# Altium PCB PCB1.PcbDoc
Units mm, origin at the board's own origin, x right, y up, seen from the top; angles counter-clockwise.
Board outline 93.22 x 51.43 mm, 2 copper layers (Top Layer, Bottom Layer); 35 components, 31 nets, 133 pads, 0 vias.
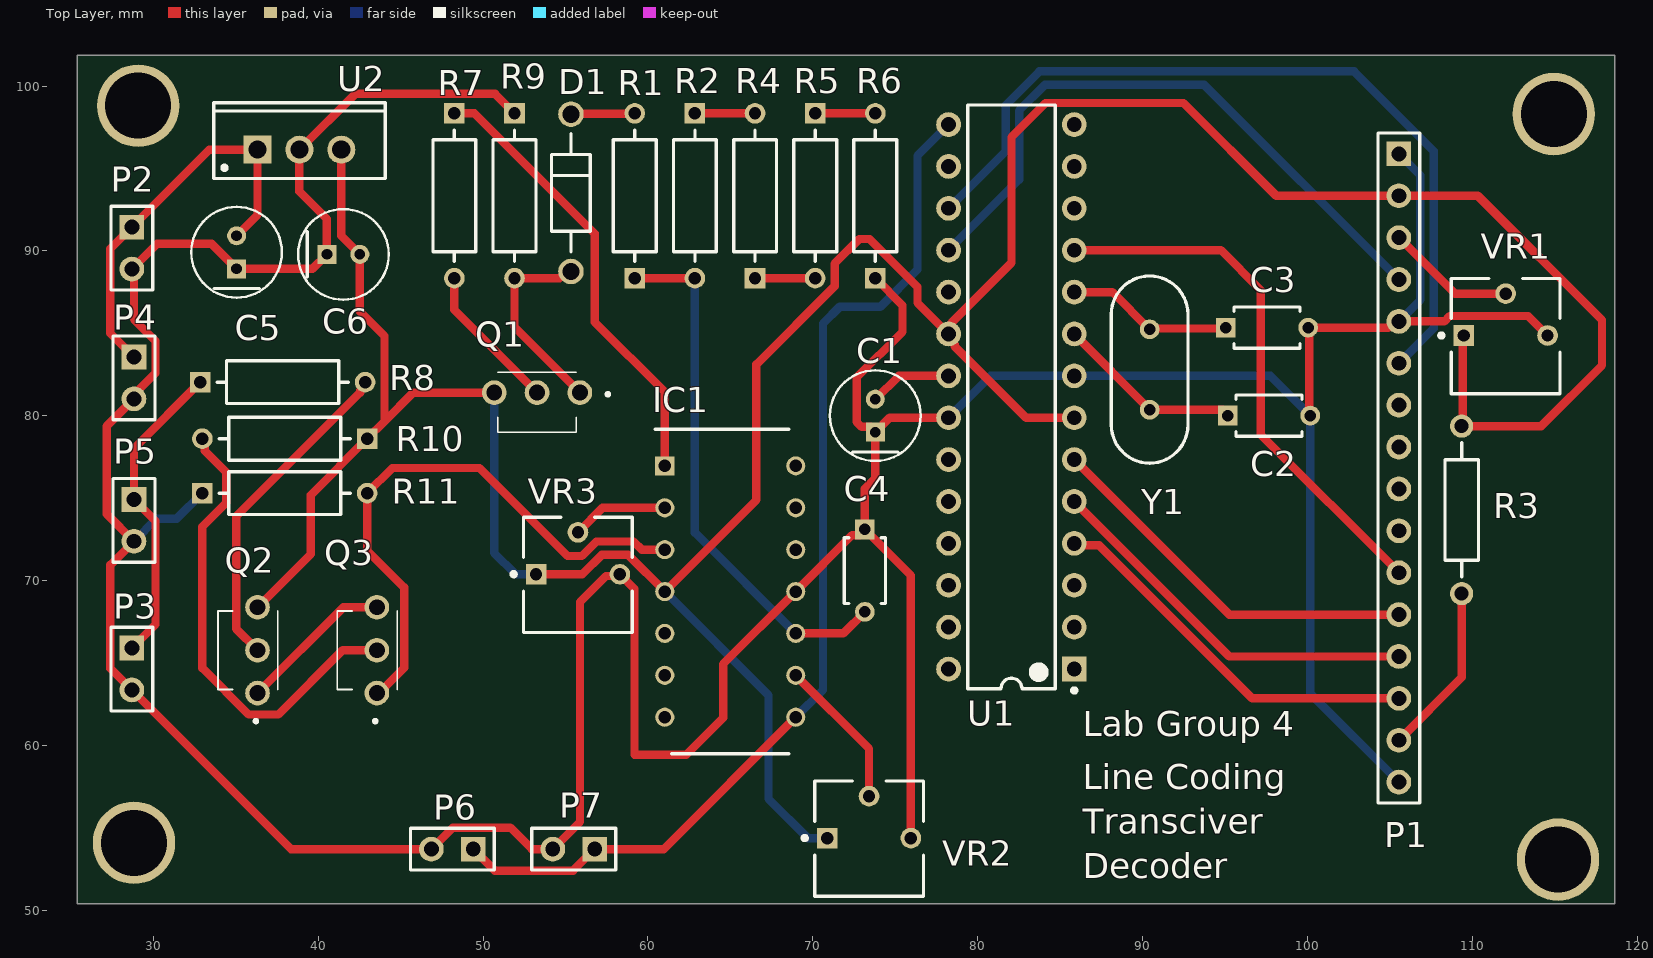
[diagram p0: Top Layer view]
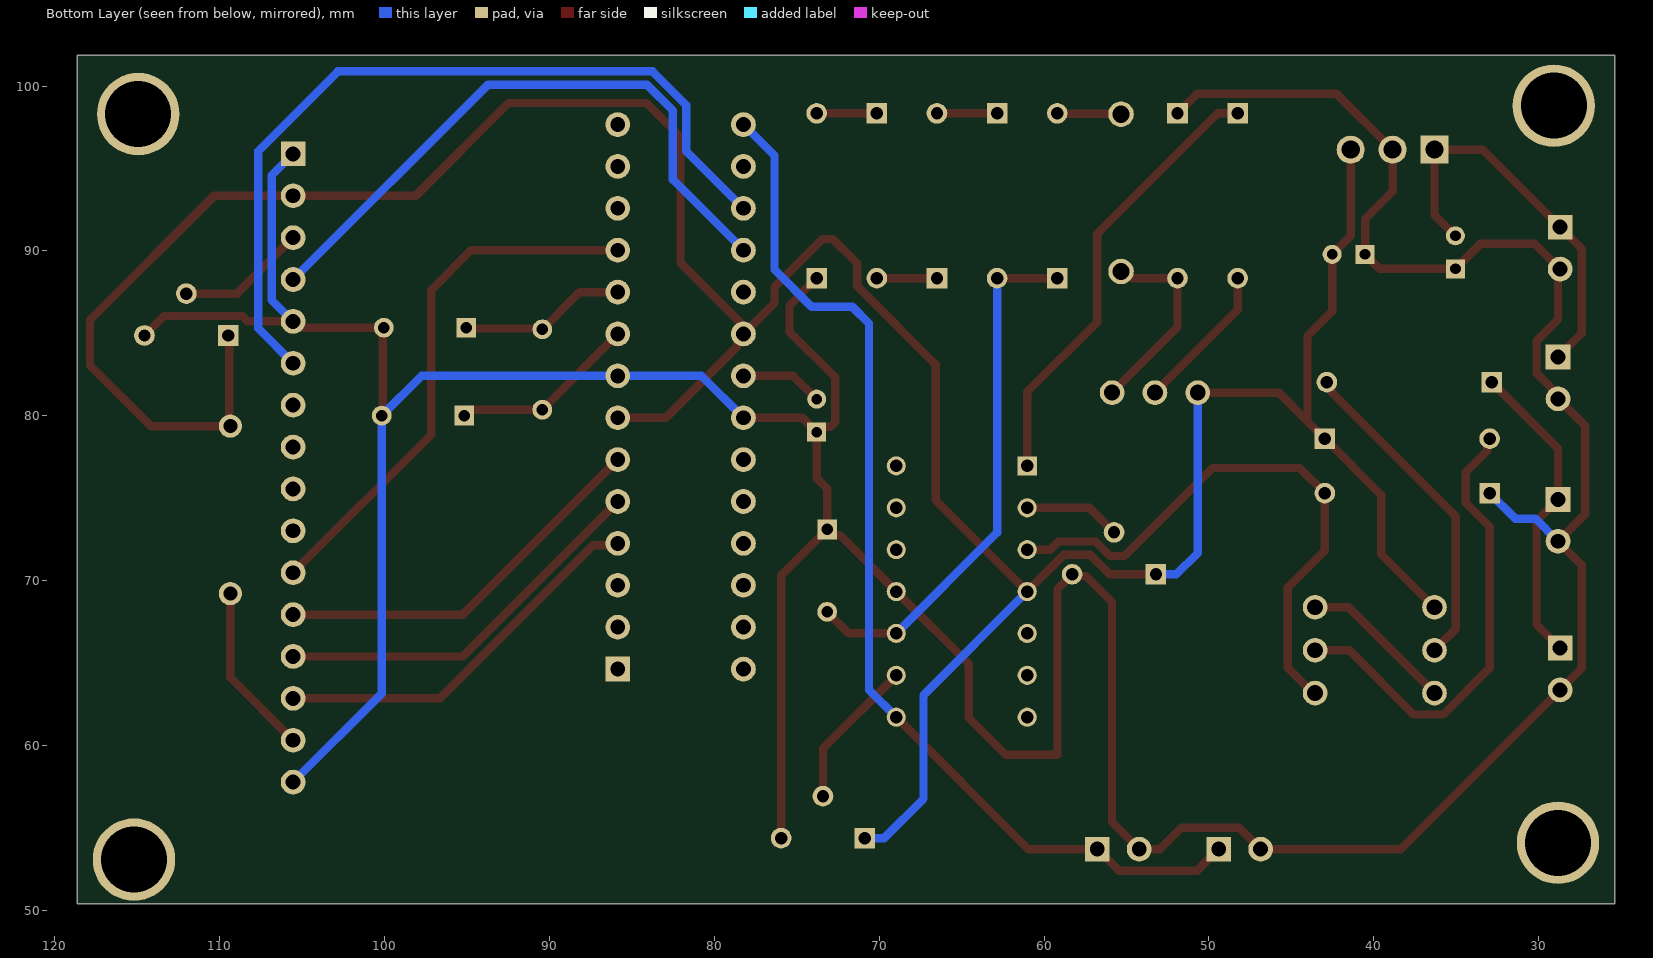
[diagram p1: Bottom Layer view, seen from below]
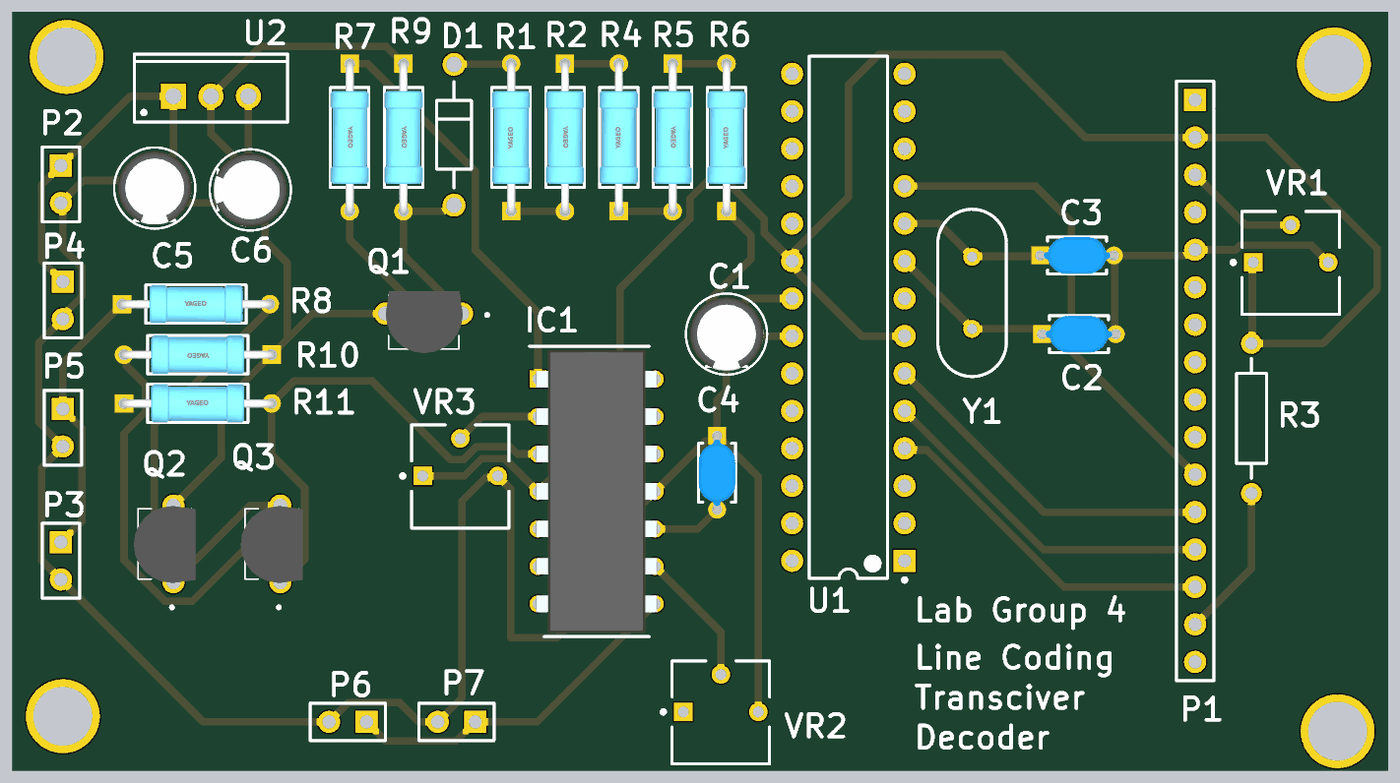
[diagram p2: 3D render of the assembled board from above, using the file's embedded part models]

## Layer stack, top to bottom
Top Solder: solder mask 0.0102, Solder Resist, Dk 3.5
Top Layer: signal copper 0.0356
Dielectric 1: dielectric 0.32, FR-4, Dk 4.8
Bottom Layer: signal copper 0.0356
Bottom Solder: solder mask 0.0102, Solder Resist, Dk 3.5

## Board outline
25.4,50.419 118.618,50.419 118.618,101.854 25.4,101.854

## Design rules (kind name [scope] priority, off if disabled: settings)
AssemblyTestPointUsage [All] p1: valid=2
Clearance [All] p1: gap=0.3 ignorepadtopadclearanceinfootprint=TRUE
FabricationTestPointUsage [All] p1: valid=2 allowmultiple=FALSE
HoleSize [All] p1: absolutevalues=TRUE maxlimit=1.3 minlimit=0.6 maxpercent=80.000 minpercent=20.000
PolygonConnect [All] p1: connectstyle=Relief reliefconductorwidth=0.254 reliefentries=4 polygonreliefangle="90 Angle" airgapwidth=0.254
RoutingVias [All] p1: holewidth=0.711 width=1.27 viastyle="Through Hole" minholewidth=0.711 minwidth=1.27 maxholewidth=0.711 maxwidth=1.27
SilkToSilkClearance [All] p1: silktosilkclearance=0.1
SolderMaskExpansion [All] p1: expansion=0.102 istentingtop=FALSE
Width [All] p1: maxlimit=0.635 minlimit=0.381 preferedwidth=0.508
26 further rules are at their usual default settings.

## Components (designator, comment, footprint, x,y, rotation, side; value= is the part's Value field where it differs from the comment)
C1 "UVR2AR22MDD1TD" FP-UVR2AR22MDD1TD-MFG 73.787,80.01 r90 top
C2 "22pF" FP-RDE0M1-MFG 97.663,80.01 r0 top
C3 "22pF" FP-RDE0M1-MFG 97.536,85.344 r0 top
C4 "22pF" FP-RDE0M1-MFG 73.152,70.612 r270 top
C5 "UVR2AR22MDD1TD" FP-UVR2AR22MDD1TD-MFG 35.052,89.916 r90 top
C6 "UVR2AR22MDD1TD" FP-UVR2AR22MDD1TD-MFG 41.529,89.789 r0 top
D1 "1N4001" ONSC-AXIAL_LEAD-2-59-10_P 55.328,93.523 r270 top
IC1 "LM324N" DIP794W56P254L1918H533Q14N 64.991,69.342 r0 top
P1 "Header 16" HDR1X16 105.537,95.885 r270 top
P2 "Header 2" HDR1X2 28.702,91.44 r270 top
P3 "Header 2" HDR1X2 28.702,65.913 r270 top
P4 "Header 2" HDR1X2 28.829,83.566 r270 top
P5 "Header 2" HDR1X2 28.829,74.93 r270 top
P6 "Header 2" HDR1X2 49.403,53.721 r180 top
P7 "Header 2" HDR1X2 56.769,53.721 r180 top
Q1 "2N3904TA" BC33740TA 54.173,80.822 r180 top
Q2 "2N3904TA" BC33740TA 35.737,64.886 r90 top
Q3 "2N3904TA" BC33740TA 42.976,64.886 r90 top
R1 "MFR-25FBF52-1K18" FP-MFR-25-MFG 59.2,93.345 r90 top value=1.18kΩ
R2 "MFR-25FBF52-1K18" FP-MFR-25-MFG 62.847,93.345 r270 top value=1.18kΩ
R3 "Res2" AXIAL-0.4 109.347,74.295 r270 top value=330
R4 "MFR-25FBF52-1K18" FP-MFR-25-MFG 66.494,93.345 r90 top value=1.18kΩ
R5 "MFR-25FBF52-1K18" FP-MFR-25-MFG 70.14,93.345 r270 top value=1.18kΩ
R6 "MFR-25FBF52-1K18" FP-MFR-25-MFG 73.787,93.345 r90 top value=1.18kΩ
R7 "MFR-25FBF52-1K18" FP-MFR-25-MFG 48.26,93.345 r270 top value=1.18kΩ
R8 "MFR-25FBF52-1K18" FP-MFR-25-MFG 37.846,82.042 r0 top value=1.18kΩ
R9 "MFR-25FBF52-1K18" FP-MFR-25-MFG 51.907,93.345 r270 top value=1.18kΩ
R10 "MFR-25FBF52-1K18" FP-MFR-25-MFG 37.973,78.613 r180 top value=1.18kΩ
R11 "MFR-25FBF52-1K18" FP-MFR-25-MFG 37.973,75.311 r0 top value=1.18kΩ
U1 "ATmega328P-PU" 28P3 82.042,81.153 r180 top
U2 "L7805CV" TO220 38.862,96.139 r0 top
VR1 "3362P-1-103LF" BOUR-3362P 112.014,84.836 r0 top
VR2 "3362P-1-103LF" BOUR-3362P 73.406,54.356 r0 top
VR3 "3362P-1-103LF" BOUR-3362P 55.753,70.358 r0 top
Y1 "FOXSLF/120-20" FOX-FOXSLF-2_V 90.424,82.804 r270 top

## Footprints (in the part's own frame and the unit in brackets; to place one, negate y for a bottom-side part, rotate by r counter-clockwise, add the part's x,y. Pads: shape width x height; smd on the part's side, far side on the other; paste and mask are expansions set on the pad)
28P3 [mm] "28-Pin Plastic Dual In-Line Package (PDIP)"
  rect 1.5x1.5 hole 0.9: 1(-3.81,16.51)
  round 1.5 hole 0.9: 2(-3.81,13.97) 3(-3.81,11.43) 4(-3.81,8.89) 5(-3.81,6.35) 6(-3.81,3.81) 7(-3.81,1.27) 8(-3.81,-1.27) 9(-3.81,-3.81) 10(-3.81,-6.35) 11(-3.81,-8.89) 12(-3.81,-11.43) 13(-3.81,-13.97) 14(-3.81,-16.51) 15(3.81,-16.51) 16(3.81,-13.97) 17(3.81,-11.43) 18(3.81,-8.89) 19(3.81,-6.35) 20(3.81,-3.81) 21(3.81,-1.27) 22(3.81,1.27) 23(3.81,3.81) 24(3.81,6.35) 25(3.81,8.89) 26(3.81,11.43) 27(3.81,13.97) 28(3.81,16.51)
  silkscreen extent -3.94,-17.7 2.65,17.93, body extent -3.6,-17.65 3.6,17.65, height 4.58
AXIAL-0.4 [mm] "Axial Device, Thru-Hole; 2 Leads; 0.4 in Pin Spacing"
  round 1.4 hole 0.85: 1(-5.08,0) 2(5.08,0)
  silkscreen extent -4.06,-1.02 4.06,1.02
BC33740TA [mm]
  round 1.493 hole 0.96: 1(-1.7,-0.585) 2(0.9,-0.585) 3(3.5,-0.585)
  silkscreen extent -3.5,-1.81 3.28,1.81, body extent -1.74,-2.09 3.46,2.1, height 5.74
BOUR-3362P [mm] "THD, 3-Leads, Body 6.6x6.99mm, Pitch 2.54mm"
  rect 1.25x1.25 hole 0.75: 1(-2.54,0.035)
  round 1.25 hole 0.75: 2(0,2.575) 3(2.54,0.035)
  silkscreen extent -4.02,-3.49 3.3,3.5, body extent -3.3,-3.49 3.3,3.49, height 4.95
DIP794W56P254L1918H533Q14N [mm]
  rect 1.16x1.16 hole 0.76: 1(-3.97,7.62)
  round 1.16 hole 0.76: 2(-3.97,5.08) 3(-3.97,2.54) 4(-3.97,0) 5(-3.97,-2.54) 6(-3.97,-5.08) 7(-3.97,-7.62) 8(3.97,-7.62) 9(3.97,-5.08) 10(3.97,-2.54) 11(3.97,0) 12(3.97,2.54) 13(3.97,5.08) 14(3.97,7.62)
  silkscreen extent -4.55,-9.84 3.55,9.84, body extent -4.11,-9.59 4.11,9.59, height 5.33
FOX-FOXSLF-2_V [mm] "THD, 2-Leads, Body 11.35x4.65mm, Pitch 4.88mm"
  round 1.2 hole 0.7: 1(-2.44,0) 2(2.44,0)
  silkscreen extent -5.68,-2.33 5.68,2.33, body extent -5.67,-2.32 5.68,2.32, height 3.6
FP-MFR-25-MFG [mm]
  rect 1.25x1.25 hole 0.75 paste-1000 mask+0: 1(-5,0)
  round 1.25 hole 0.75 paste-1000 mask+0: 2(5,0)
  silkscreen extent -3.98,-1.3 3.98,1.3, body extent -5.72,-1.4 5.72,1.4, height 0.25
FP-RDE0M1-MFG [mm]
  rect 1.2x1.2 hole 0.7 paste-1000 mask+0: 1(-2.5,0)
  round 1.2 hole 0.7 paste-1000 mask+0: 2(2.5,0)
  silkscreen extent -2,-1.25 2,1.25, body extent -3.2,-1.35 3.2,1.35, height 0.25
FP-UVR2AR22MDD1TD-MFG [mm]
  rect 1.15x1.15 hole 0.65 paste-1000 mask+0: 1(-1,0)
  round 1.15 hole 0.65 paste-1000 mask+0: 2(1,0)
  silkscreen extent -2.75,-2.75 2.75,2.75, body extent -2.85,-2.85 2.85,2.85, height 0.25
HDR1X2 [mm] "Connector; Header; 2 Position"
  rect 1.5x1.5 hole 0.9: 1(0,0)
  round 1.5 hole 0.9: 2(2.54,0)
  silkscreen extent -1.27,-1.27 3.81,1.27
HDR1X16 [mm] "Connector; Header; 16 Position"
  rect 1.5x1.5 hole 0.9: 1(0,0)
  round 1.5 hole 0.9: 2(2.54,0) 3(5.08,0) 4(7.62,0) 5(10.16,0) 6(12.7,0) 7(15.24,0) 8(17.78,0) 9(20.32,0) 10(22.86,0) 11(25.4,0) 12(27.94,0) 13(30.48,0) 14(33.02,0) 15(35.56,0) 16(38.1,0)
  silkscreen extent -1.27,-1.27 39.37,1.27
ONSC-AXIAL_LEAD-2-59-10_P [mm] "AXIAL, 2-Leads, Diameter 2.35mm"
  round 1.55 hole 1.05: 1(-4.77,0) 2(4.77,0)
  silkscreen extent -3.59,-1.17 3.59,1.17
TO220 [mm] "TO, Thru-Hole, Vertical, Heatsink Mounted; 3 In-Line Leads; Pitch 2.54 mm"
  rect 1.7x1.7 hole 1.1: 1(-2.54,0)
  round 1.7 hole 1.1: 2(0,0) 3(2.54,0)
  silkscreen extent -5.2,-1.75 5.2,2.85, body extent -5.25,-1.8 5.25,2.9, height 19.7

## Part data
C1 C6: library part CMP-12462-000035-1, "CAP ALUM 0.22UF 20% 100V RADIAL", Capacitance=100nF, Case/Package=Radial, Dielectric Material=Aluminium, Max Operating Temperature=85°C, Min Operating Temperature=-40°C, Package Quantity=2000, Ripple Current=4.7mA, Tolerance=20%, Voltage Rating=100V, Diameter=5mm, Dissipation Factor=0.08%, Height=11mm, Height - Seated (Max)=0.492inch, Lead Pitch=2mm, Lead/Base Style=Straight, Length=11mm, Life (Hours)=2000Hour, Mount="Through Hole", Packaging="Tape and Reel", REACH SVHC="No SVHC", RoHS Compliant=Yes, Series=VR, Termination=Radial, Voltage Rating (DC)=100V
C2 C3 C4: library part CMP-06035-051680-1, "Ceramic Capacitor 100nF ±10% 50V X7R Radial", Case/Package=Radial, Dielectric=X7R, Max Operating Temperature=125°C, Min Operating Temperature=-55°C, Package Quantity=2000, Resistor Type=Ceramic, Tolerance=10%, Voltage Rating=50V, Capacitance=22pF, Height=3.5mm, Height - Seated (Max)=0.236inch, Lead Diameter=0.5mm, Lead Free="Lead Free", Lead Pitch=0.197inch, Lead/Base Style=Kinked, Length=0.157inch, Mount="Through Hole", Packaging="Tape and Reel", Termination=Radial, Voltage Rating (DC)=50V, Width=3.5mm
C5: library part CMP-12462-000035-1, "CAP ALUM 0.22UF 20% 100V RADIAL", Capacitance=330nF, Case/Package=Radial, Dielectric Material=Aluminium, Max Operating Temperature=85°C, Min Operating Temperature=-40°C, Package Quantity=2000, Ripple Current=4.7mA, Tolerance=20%, Voltage Rating=100V, Diameter=5mm, Dissipation Factor=0.08%, Height=11mm, Height - Seated (Max)=0.492inch, Lead Pitch=2mm, Lead/Base Style=Straight, Length=11mm, Life (Hours)=2000Hour, Mount="Through Hole", Packaging="Tape and Reel", REACH SVHC="No SVHC", RoHS Compliant=Yes, Series=VR, Termination=Radial, Voltage Rating (DC)=100V
D1: library part CMP-0902-00117-1, "Standard Recovery Rectifier, 2-Pin Axial_Lead, Pb-Free, Bulk Bag", Manufacturer="On Semiconductor", ComponentLink1Description="Manufacturer URL", ComponentLink1URL=http://www.onsemi.com/, ComponentLink2Description=Datasheet, ComponentLink2URL=http://www.onsemi.com/pub_link/Collateral/1N4001-D.PDF, ComponentLink3Description="Package Specification", ComponentLink3URL=http://www.onsemi.cn/pub_link/Collateral/59-10.PDF, DatasheetVersion="Rev. 13", IFSM Max (A)=30, IO(rec) Max (A)=1, Mounting Technology="Through Hole", PackageDescription="2-Pin, Axial Lead, Diameter 2.35 mm", PackageReference=AXIAL_LEAD-2-59-10, PackageVersion="Rev. U, 02/2005", Packing="Bulk Bag", PartNumber=1N4001, RoHS=TRUE, Type="Standard Recovery", VRRM Max (V)=50
IC1: "Integrated Circuit", Manufacturer_Name="ON Semiconductor", Mouser Part Number=512-LM324N, Arrow Part Number=LM324N, Arrow Price/Stock=https://www.arrow.com/en/products/lm324n/on-semiconductor, Datasheet Link=http://www.onsemi.com/pub/Collateral/LM324-D.PDF, Height=5.33mm, Manufacturer_Part_Number=LM324N, Mouser Price/Stock=https://www.mouser.co.uk/ProductDetail/ON-Semiconductor-Fairchild/LM324N?qs=KwzQVQ%2FCbKb0cbfnXIrdrA%3D%3D
P1: "Header, 16-Pin", LatestRevisionDate=17-Jul-2002, LatestRevisionNote="Re-released for DXP Platform.", Publisher="Altium Limited"
P2 P3 P4 P5 P6 P7: "Header, 2-Pin", LatestRevisionDate=17-Jul-2002, LatestRevisionNote="Re-released for DXP Platform.", Publisher="Altium Limited"
Q1 Q2 Q3: "Transistor BJT NPN", Manufacturer_Name="ON Semiconductor", Mouser Part Number=512-2N3904TA, Arrow Part Number=2N3904TA, Arrow Price/Stock=https://www.arrow.com/en/products/2n3904ta/on-semiconductor?region=nac, Datasheet Link=http://www.onsemi.com/pub/Collateral/2N3904-D.pdf, Manufacturer_Part_Number=2N3904TA, Mouser Price/Stock=https://www.mouser.co.uk/ProductDetail/ON-Semiconductor-Fairchild/2N3904TA?qs=ljbEvF4DwOOn1Ev%2FzRYaoA%3D%3D
R1 R2 R4 R5 R6 R7 R8 R9 R10 R11: library part CMP-03413-000001-1, "RES 1.18K OHM 1/4W 1% AXIAL", Manufacturer=Yageo, Package=MFR-25, Power Rating=0.25W, Resistance=1.18kΩ, Temperature="-55°C to +155°C", Temperature Coefficient=100ppm/°C, Temperature Range High=+155°C, Temperature Range Low=-55°C, Tolerance=1%, Voltage Rating=250V, Automotive=No, Category=Res, ComponentLink2Description=Datasheet, ComponentLink2URL=https://www.yageo.com/upload/media/product/products/datasheet/lr/Yageo_LR_MFR_1.pdf, Composition="Metal Film", Device Class L1="Passive Components", Device Class L2=Resistors, Device Class L3="Through-Hole Resistors", Digikey Description="RES 1.18K OHM 1/4W 1% AXIAL", Height=2.6mm, Ipc Land Pattern Name=RESAD1000W75L680D260, Lead Free=Yes, Manufacturer Part Number=MFR-25FBF52-1K18, Mouser Description="Metal Film Resistors 1.18K OHM 1/4W 1%", Octopart=https://octopart.com/mfr-25fbf52-1k18-yageo-56251681, RoHS=TRUE, Series=MFR
R3: "Resistor", LatestRevisionDate=17-Jul-2002, LatestRevisionNote="Re-released for DXP Platform.", PackageDescription="Axial Device, Thru-Hole; 2 Leads; 0.4 in Pin Spacing", PackageReference=AXIAL-0.4, Published=8-Jun-2000, Publisher="Altium Limited"
U1: library part CMP-0095-00013-2, "8-bit AVR Microcontroller, 32KB Flash, 1KB EEPROM, 2KB SRAM, 28-pin PDIP, Industrial Grade (-40°C to 85°C)", ComponentLink1Description="Manufacturer URL", ComponentLink1URL=http://www.atmel.com/, ComponentLink2Description="ATmega48A/48PA/88A/88PA/168A/168PA/328/328P Datasheet", ComponentLink2URL=http://www.atmel.com/dyn/resources/prod_documents/8271.pdf, ComponentLink3Description="ATmega48A/48PA/88A/88PA/168A/168PA/328/328P Summary", ComponentLink3URL=http://www.atmel.com/dyn/resources/prod_documents/8271S.pdf, DatasheetVersion="revD, May-2011", PackageDescription="28-lead (0.300\"/7.62mm Wide) Plastic Dual Inline Package (PDIP)", PackageReference=28P3, PackageVersion="revB, Sep-2001", RevisionNote="DatasheetVersion updated. URLs added."
U2: library part CMP-0244-00483-1, "Positive Voltage Regulator, 5V, 3-Pin TO-220", ComponentLink1Description="Manufacturer URL", ComponentLink1URL=http://www.st.com, ComponentLink2Description=Datasheet, ComponentLink2URL=http://www.st.com/internet/com/TECHNICAL_RESOURCES/TECHNICAL_LITERATURE/DATASHEET/CD00000444.pdf, ComponentLink3Description="Package Specification", ComponentLink3URL=http://www.st.com/internet/com/TECHNICAL_RESOURCES/TECHNICAL_LITERATURE/PACKAGE_INFORMATION/CD00004649.pdf, DatasheetVersion=16/11/2011, PackageDescription="TO, Thru-Hole, Vertical, Heatsink Mounted; 3 In-Line Leads; Pitch 2.54 mm", PackageReference=TO220, PackageVersion=ver3.0
VR1 VR2 VR3: library part CMP-1747-00004-1, "Square Trimpot(R) Trimming Potentiometer, 10 KOhm, 300 V, -55 to 125 degC, 3-Pin THD, RoHS, Tube", Case Code (Imperial)=0612, Case Code (Metric)=1632, Case/Package=1206, Max Operating Temperature=125degC, Min Operating Temperature=-25degC, Package Quantity=5000, Power Rating="1 W", Resistance="50 mohm", Tolerance=1%, Voltage Rating="220 mV", ComponentLink1Description="Manufacturer URL", ComponentLink1URL=http://www.bourns.com/, ComponentLink2Description=Datasheet, ComponentLink2URL=http://www.bourns.com/docs/Product-Datasheets/3362.pdf, DatasheetVersion=May-16, Height="0.6 mm", Length="3.2 mm", Mount="Surface Mount", PackageDescription="3-Pin Through Hole Device, Body 6.6 x 6.99 mm, Pitch 2.54 mm", PackageReference=3326P, Packaging="Tape and Reel", Pins=2, REACH SVHC="No SVHC", RoHSCompliant=True, Width="1.6 mm"
Y1: library part CMP-1749-00004-1, "Resistance Weld Thru-Hole Crystal, 12 MHz, +/-30 ppm, -20 to 70 degC, 2-Pin THD, RoHS, Bulk", Case\Package=TO-251-3, Input Capacitance="350 pF", Max Operating Temperature="150 degC", Max Power Dissipation="2.5 W", Min Operating Temperature="-55 degC", Package Quantity=70, ComponentLink1Description="Manufacturer URL", ComponentLink1URL=http://www.foxonline.com/, ComponentLink2Description=Datasheet, ComponentLink2URL=http://www.foxonline.com/pdfs/hc49slf.pdf, DatasheetVersion=Mar-15, Elements=1, Height="6.1 mm", Length="6.6 mm", Mount="Through Hole", PackageDescription="2-Pin Through Hole Device, Body 11.35 x 4.65 mm, Pitch 4.88 mm", PackageReference=FOXSLF-2, Packaging=Rail/Tube, Pins=3, Radiation Hardening=No, Rds On Max="115 mohm", REACH SVHC="No SVHC", RoHSCompliant=true, Typical Rise Time="90 ns", Width="2.3 mm"

## Free pads (board coordinates)
  round 5 hole 4: 2(29.083,98.806) 3(28.829,54.102) 4(115.189,53.086) 5(114.935,98.298)

## Nets (pads, with @x,y where several pads share a name; then routed paths per layer and width w, separated by ;. In a path a pad name is that pad's centre, name@x,y a point inside that pad or via, vN(x,y) a via of type N, cw(c..) or ccw(c..) an arc to the next point about the centre after c; other vN are vias at no path point)
6V: C6.2 IC1.4 P1.2 Q1.3 Q2.3 R3.1 R10.1 U1.7 U1.20 U2.3 VR1.1 VR2.1 VR3.1 | length 199.7
  Top Layer w0.508: Q2.3 39.556,71.62 39.556,75.196 R10.1 44.025,79.665 ; U2.3 41.402,90.916 C6.2 42.529,86.332 44.025,84.836 44.025,79.665 ; Q1.3 45.767,81.407 44.025,79.665 ; VR3.1 56.023,70.393 57.202,71.572 58.791,71.572 IC1.4 66.577,74.898 66.577,83.115 71.319,87.857 71.319,89.226 72.815,90.722 73.444,90.722 76.342,87.824 76.342,86.853 U1.20 ; U1.7 82.931,79.883 78.603,84.211 78.603,84.324 78.232,84.695 U1.20 ; VR1.1 109.41,84.808 109.41,79.438 R3.1 114.173,79.375 117.856,83.058 117.856,85.812 110.323,93.345 P1.2 98.101,93.345 92.479,98.967 84.108,98.967 82.042,96.901 82.042,89.281 78.422,85.661 78.422,85.153 U1.20
  Bottom Layer w0.508: Q1.3 50.673,71.688 51.968,70.393 VR3.1 ; IC1.4 67.31,63.053 67.31,56.769 69.688,54.391 VR2.1
Bits: U1.12
D4: P1.11 U1.11 | length 32.9
  Top Layer w0.508: U1.11 94.742,90.043 97.155,87.63 97.155,78.867 P1.11
D5: P1.12 U1.6 | length 23.6
  Top Layer w0.508: U1.6 95.25,67.945 P1.12
D6: P1.13 U1.5 | length 23.6
  Top Layer w0.508: U1.5 95.25,65.405 P1.13
D7: P1.14 U1.4 | length 23.6
  Top Layer w0.508: U1.4 85.967,72.148 87.364,72.148 96.647,62.865 P1.14
Data: P3.1 P5.1 R8.1 | length 18.9
  Top Layer w0.508: P3.1 30.133,67.344 30.133,73.626 P5.1 28.829,78.025 R8.1
Div1: IC1.2 VR3.2 | length 5.9
  Top Layer w0.508: VR3.2 57.242,74.422 IC1.2
Div2: IC1.9 VR2.2 | length 9.2
  Top Layer w0.508: IC1.9 73.406,59.817 VR2.2
Div3: P1.3 VR1.2 | length 7.9
  Top Layer w0.508: P1.3 108.931,87.411 VR1.2
E: P1.6 U1.17 | length 50.2
  Bottom Layer w0.508: U1.17 81.699,96.05 81.699,98.844 83.739,100.884 102.821,100.884 107.649,96.056 107.649,85.297 P1.6
GND: C1.1 C2.2 C3.2 C4.1 C5.1 C6.1 IC1.11 P1.1 P1.5 P1.16 P2.2 P3.2 P4.2 P5.2 P6.2 P7.2 R6.1 R9.1 R11.1 U1.8 U1.22 U2.2 VR1.3 VR2.3 VR3.3 | length 275.3
  Top Layer w0.508: R9.1 50.728,99.524 42.247,99.524 U2.2 38.862,93.599 40.529,91.932 C6.1 39.656,88.916 C5.1 33.544,90.424 30.226,90.424 P2.2 28.829,88.773 28.829,85.849 30.133,84.545 30.133,82.587 29.019,81.472 29.019,81.216 27.178,79.375 27.178,74.041 P5.2 27.398,70.959 27.398,64.677 P3.2 38.354,53.721 P6.2 48.167,55.025 51.655,55.025 52.959,53.721 P7.2 55.88,55.372 55.88,68.707 57.457,70.284 58.184,70.284 VR3.3 59.182,69.504 59.182,59.436 62.313,59.436 64.56,61.683 64.56,64.941 IC1.11 72.385,72.766 72.806,72.766 C4.1 ; R6.1 75.438,86.694 75.438,85.09 72.658,82.31 72.658,79.629 72.956,79.331 73.466,79.331 C1.1 ; VR2.3 75.946,70.318 C4.1 ; U1.22 74.66,79.883 C1.1 ; C2.2 100.1,80.073 100.1,85.281 C3.2 104.888,85.344 105.269,85.725 P1.5 108.295,85.725 108.62,86.05 113.375,86.05 VR1.3 ; C4.1 73.152,75.583 73.787,76.218 C1.1
  Bottom Layer w0.508: P5.2 30.199,73.76 31.422,73.76 R11.1 ; U1.22 80.772,82.423 U1.8 97.75,82.423 C2.2 100.163,63.159 P1.16 ; P1.5 106.841,87.029 106.841,94.581 P1.1
NetC1_2: C1.2 U1.21 | length 5
  Top Layer w0.508: C1.2 73.801,81.01 75.214,82.423 U1.21
NetC2_1: C2.1 U1.9 Y1.2 | length 11.4
  Top Layer w0.508: U1.9 85.852,84.949 90.424,80.377 Y1.2 94.809,80.364 C2.1
NetC3_1: C3.1 U1.10 Y1.1 | length 10.2
  Top Layer w0.508: U1.10 88.165,87.503 Y1.1 90.474,85.294 94.986,85.294 C3.1
NetD1_1: D1.1 R1.2 | length 3.9
  Top Layer w0.508: D1.1 55.354,98.319 59.174,98.319 R1.2
NetP1_15: P1.15 R3.2 | length 10.5
  Top Layer w0.508: P1.15 109.347,64.135 R3.2
NetQ1_2: Q1.2 R7.2 | length 9
  Top Layer w0.508: R7.2 48.26,86.42 Q1.2
NetQ2_1: Q2.1 Q3.3 | length 9.4
  Top Layer w0.508: Q2.1 41.522,68.386 Q3.3
NetQ2_2: Q2.2 R8.2 | length 20
  Top Layer w0.508: Q2.2 35.021,67.087 35.021,73.883 42.54,81.402 42.54,81.535 42.846,81.841 R8.2
NetQ3_2: Q3.2 R10.2 | length 28.5
  Top Layer w0.508: R10.2 33.115,78.471 33.115,77.883 34.417,76.581 34.417,74.722 32.973,73.278 32.973,64.696 35.783,61.886 37.589,61.886 41.489,65.786 Q3.2
NetR2_1: R2.1 R4.2 | length 3.6
  Top Layer w0.508: R2.1 R4.2
NetR4_1: R4.1 R5.2 | length 3.6
  Top Layer w0.508: R4.1 R5.2@70.14,88.345
NetR5_1: R5.1 R6.2 | length 3.6
  Top Layer w0.508: R5.1@70.14,98.345 R6.2
Opin1: C4.2 IC1.10 R1.1 R2.2 | length 32.5
  Top Layer w0.508: R1.1 R2.2 ; IC1.10 71.842,66.802 C4.2
  Bottom Layer w0.508: R2.2 62.847,72.916 IC1.10
Opout1: IC1.1 R7.1 | length 27.4
  Top Layer w0.508: R7.1 49.483,98.345 56.769,91.059 56.769,85.688 61.021,81.436 IC1.1
Out1: IC1.3 Q3.1 R11.2 | length 35.3
  Top Layer w0.508: Q3.1 43.687,63.186 45.212,64.711 45.212,69.596 42.973,71.835 R11.2 44.497,76.835 49.784,76.835 55.118,71.501 55.988,71.501 56.867,72.38 59.126,72.38 59.624,71.882 IC1.3
Out3: D1.2 Q1.1 R9.2 | length 12.4
  Top Layer w0.508: D1.2 55.046,88.753 54.638,88.345 R9.2 51.907,85.373 Q1.1 Q1.1@55.873,81.674
Output: IC1.8 P6.1 P7.1 U1.15 | length 65.2
  Top Layer w0.508: P6.1 50.707,52.417 55.465,52.417 P7.1 60.96,53.721 IC1.8
  Bottom Layer w0.508: IC1.8 70.612,63.373 70.612,85.598 71.628,86.614 74.089,86.614 76.342,88.866 76.342,95.773 U1.15
RS: P1.4 U1.18 | length 38.8
  Bottom Layer w0.508: U1.18 82.507,94.318 82.507,98.509 84.074,100.076 93.726,100.076 P1.4
VCC: C5.2 P2.1 P4.1 U2.1 | length 24.3
  Top Layer w0.508: P4.1 27.398,84.997 27.398,90.136 P2.1 33.401,96.139 U2.1 36.322,92.186 C5.2
pads on no net: IC1.5 IC1.6 IC1.7 IC1.12 IC1.13 IC1.14 P1.7 P1.8 P1.9 P1.10 U1.1 U1.2 U1.3 U1.13 U1.14 U1.16 U1.19 U1.23 U1.24 U1.25 U1.26 U1.27 U1.28

## Other copper
Top Layer:

## Silkscreen, mask and mechanical layers (free items; w line width, h text height)
Top Overlay:
  text "Lab Group 4" at 86.36,60.579 h1.52
  text "Line Coding" at 86.36,57.362 h1.52
  text "Transciver" at 86.36,54.652 h1.52
  text "Decoder" at 86.36,51.943 h1.52
Outline:
  lines w0.254: 25.4,101.854 25.4,50.419 118.745,50.419 118.745,101.981 25.527,101.981